# Allegro board Microcontroleur.brd
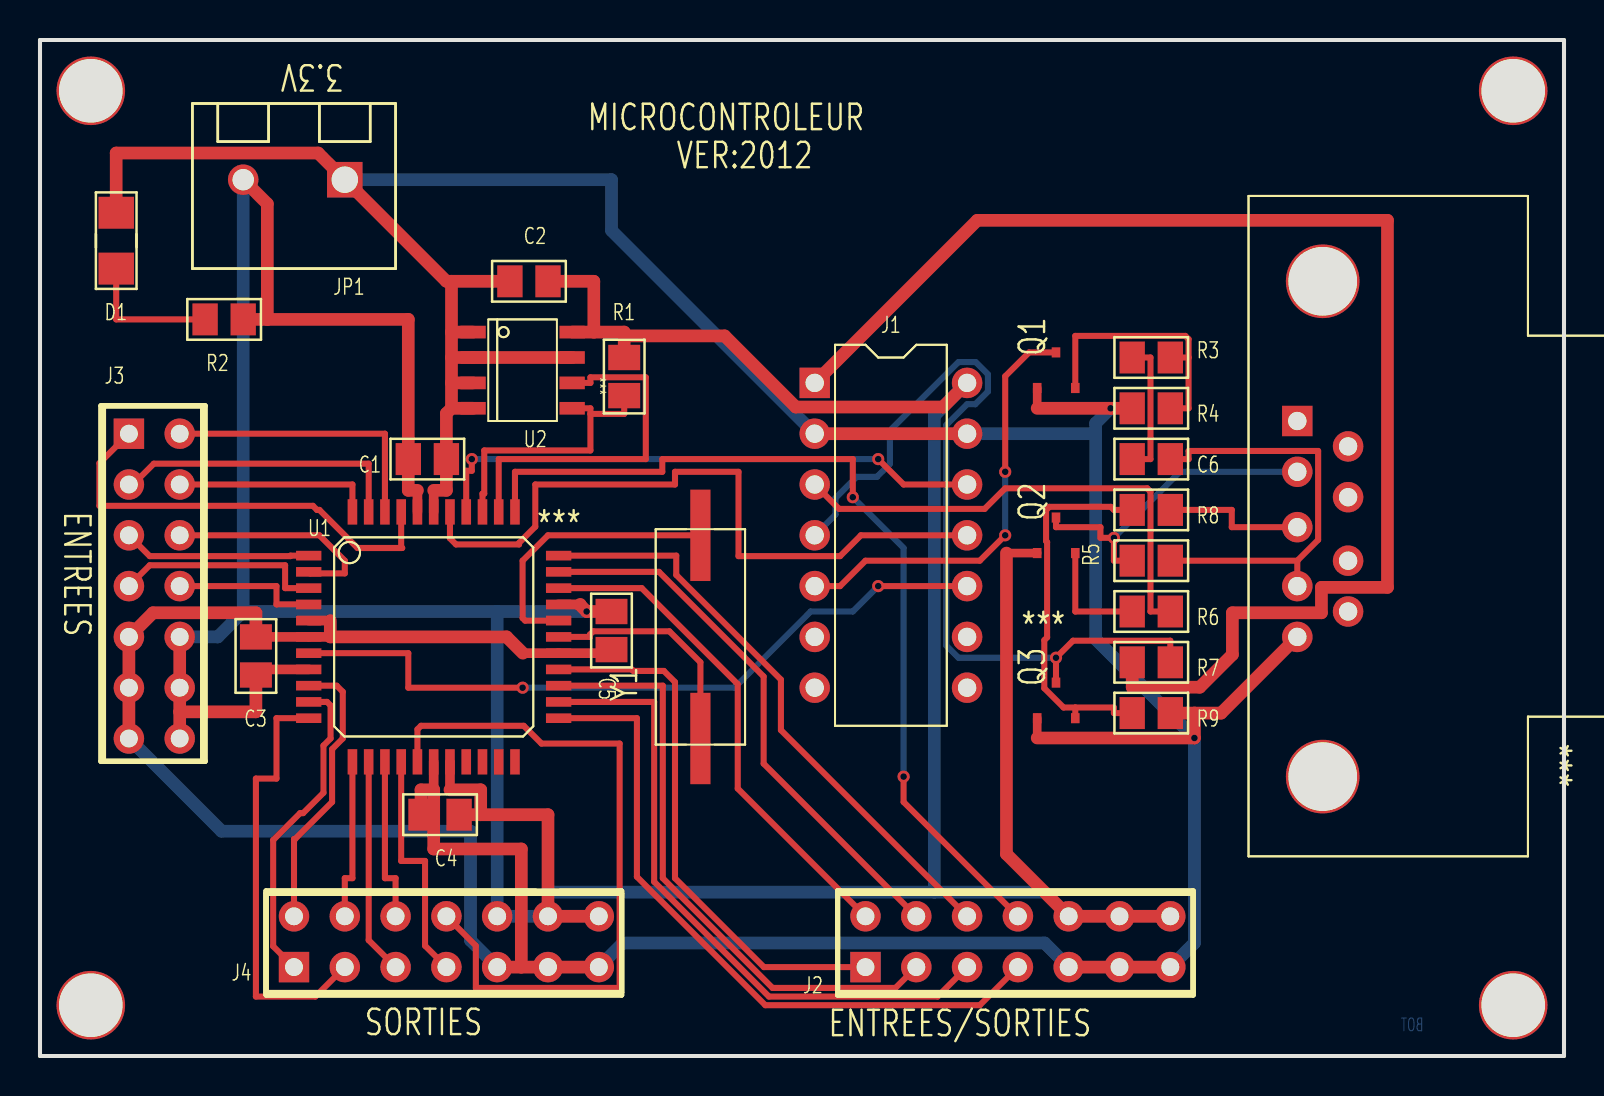
[diagram p0: board, top side]
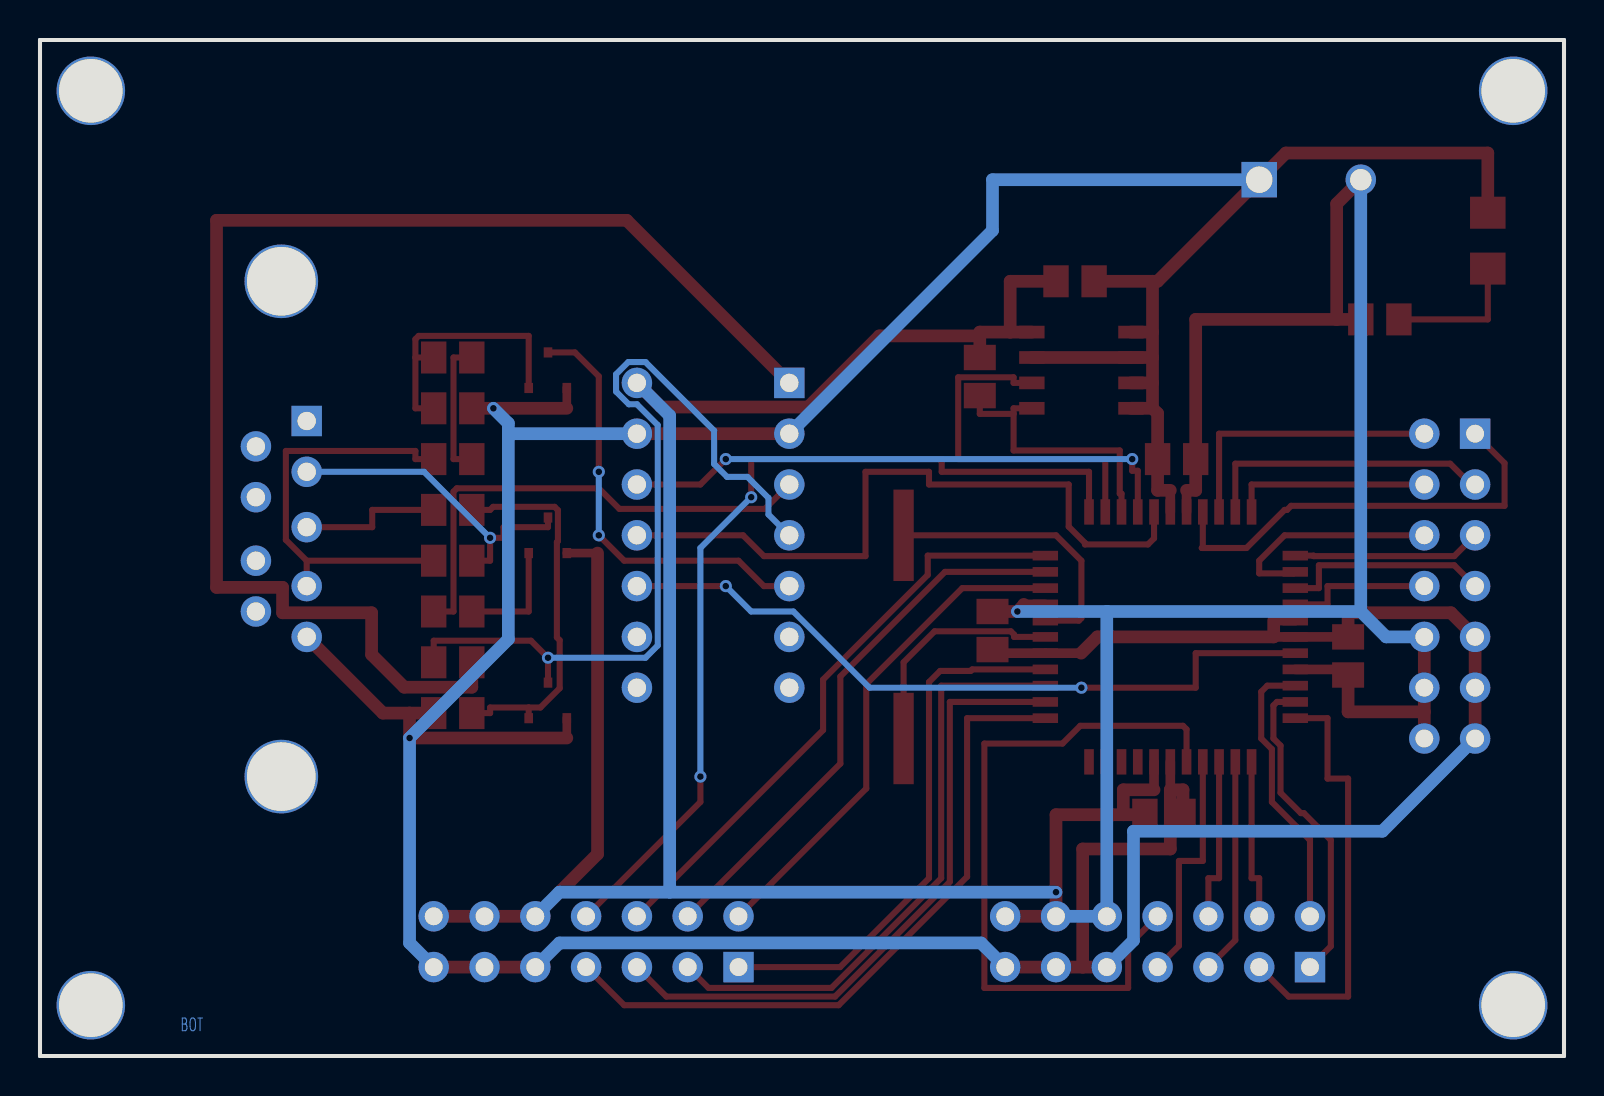
[diagram p1: board, bottom side, seen from below]

Outline 76.2 x 50.8 mm; copper layers: TOP, BOTTOM. Coordinates in mm from the lower left corner of the outline.

## Design rules (mm)
nets with their own width: min track width 0.178; nets 3.3V 3.3VEXT GND
nets with their own width: min track width 0.305; nets N00317 N01659 N01662 N02322 N02325 N25718 N27959 N27974 N50194 N50248 N50252 N50256 N50302 N50360 N50422 P0 P1 P2 P3 P4 P5 P6 P7 P8 P9 P10 P11 P12 P13 P14 P15 P20 P21 P22 P23 P24 P25 P26 P27 RESN RX TX

## Placement (name value [footprint] x y rotation side)
C1  0.1uF  [C_0805]  18.41 29.84 0 top
C2  0.1uF  [C_0805]  25.4 38.73 180 top
C3  0.1uF  [C_0805]  10.79 19.05 90 top
C4  0.1uF  [C_0805]  20.95 12.06 180 top
C5  0.1uF  [C_0805]  28.57 22.23 270 top
C6  0.01uF  [C_0805]  56.52 29.84 180 top
D1  Rouge  [D_1206]  3.81 39.37 90 top
J1  DIP-14  [DIP14_3]  38.73 33.66 0 top
J2  8-Entrees/Sorties  [HEADER_14]  41.27 4.45 0 top
J3  8-Entrees  [HEADER_14]  4.45 31.11 270 top
J4  8-Sorties  [HEADER_14]  12.7 4.45 0 top
JP1  3.3V  [CONNECTEUR_2_200]  15.24 43.81 180 top
NOREF  -  [unnamed]  0 0 0 top
P1  CONNECTOR DB9  [DB9_FEMELLE]  62.87 20.95 270 top
Q1  2N3904  [SOT23-312]  50.8 34.29 90 top
Q2  2N3906  [SOT23-312]  50.8 26.04 90 top
Q3  2N3904  [SOT23-312]  50.8 17.78 90 top
R1  10K  [R_0805]  29.21 33.02 90 top
R2  220  [R_0805]  10.16 36.83 180 top
R3  10K  [R_0805]  54.61 34.92 0 top
R4  10K  [R_0805]  56.52 32.38 180 top
R5  10K  [R_0805]  56.52 24.77 180 top
R6  1k  [R_0805]  54.61 22.23 0 top
R7  4.7k  [R_0805]  54.61 19.68 0 top
R8  10K  [R_0805]  56.52 27.3 180 top
R9  10K  [R_0805]  54.61 17.14 0 top
U1  P8X32A-Q44  [PQFP44]  19.68 20.95 0 top
U2  24LC256  [SOIC8]  24.13 34.29 0 top
Y1  10.0MHz  [CRYSTAL_SMD_180_40]  33.02 20.95 90 top

## Library data of the parts
C1-C5 = C
C6 = CAP
D1 = LED_0
J1 = DIPSOC-7x2: Tolerance: ***; User Part Number: ***
J2-J4 = HEADER 7X2
JP1 = HEADER 2_0
P1 = CONNECTOR DB9: User Part Number: ***
Q1 Q3 = 2N3904
Q2 = 2N3906
R1-R9 = R
U1 = P8X32A-d40_15: Tolerance: ***; User Part Number: ***
U2 = 24LC256_1: Tolerance: ***; User Part Number: ***
Y1 = CRYSTAL

## Footprints (pads in the part's own frame, mm; a bottom-side part is the same pattern mirrored in y, then rotated)
C_0805
  rect 1.27x1.6 smd: 1(0,0) 2(1.905,0)
CONNECTEUR_2_200
  rect 1.778x1.778 hole 1.321: 1(0,0)
  round 1.524 hole 1.067: 2(5.08,0)
CRYSTAL_SMD_180_40
  rect 4.572x1.016 smd: 1(-5.08,0) 2(5.08,0)
D_1206
  rect 1.6x1.778 smd: 1(0,0) 2(2.794,0)
DB9_FEMELLE
  round 3.683 hole 3.429 unplated: (-17.78,1.27) (6.985,1.27)
  rect 1.524x1.524 hole 0.914: 1(-10.795,0)
  round 1.524 hole 0.914: 2(-8.255,0) 3(-5.486,0) 4(-2.54,0) 5(0,0) 6(-9.525,2.54) 7(-6.985,2.54) 8(-3.81,2.54) 9(-1.27,2.54)
DIP14_3
  rect 1.524x1.524 hole 0.914: 1(0,0)
  round 1.524 hole 0.914: 2(0,-2.54) 3(0,-5.08) 4(0,-7.62) 5(0,-10.16) 6(0,-12.7) 7(0,-15.24) 8(7.62,-15.24) 9(7.62,-12.7) 10(7.62,-10.16) 11(7.62,-7.62) 12(7.62,-5.08) 13(7.62,-2.54) 14(7.62,0)
HEADER_14
  rect 1.524x1.524 hole 0.889: 1(0,0)
  round 1.524 hole 0.889: 2(0,2.54) 3(2.54,0) 4(2.54,2.54) 5(5.08,0) 6(5.08,2.54) 7(7.62,0) 8(7.62,2.54) 9(10.16,0) 10(10.16,2.54) 11(12.7,0) 12(12.7,2.54) 13(15.24,0) 14(15.24,2.54)
PQFP44
  rect 1.27x0.483 smd: 1(-6.248,4.064) 2(-6.248,3.251) 3(-6.248,2.438) 4(-6.248,1.626) 5(-6.248,0.813) 6(-6.248,0) 7(-6.248,-0.813) 8(-6.248,-1.626) 9(-6.248,-2.438) 10(-6.248,-3.251) 11(-6.248,-4.064) 23(6.248,-4.064) 24(6.248,-3.251) 25(6.248,-2.438) 26(6.248,-1.626) 27(6.248,-0.813) 28(6.248,0) 29(6.248,0.813) 30(6.248,1.626) 31(6.248,2.438) 32(6.248,3.251) 33(6.248,4.064)
  rect 0.483x1.27 smd: 12(-4.064,-6.248) 13(-3.251,-6.248) 14(-2.438,-6.248) 15(-1.626,-6.248) 16(-0.813,-6.248) 17(0,-6.248) 18(0.813,-6.248) 19(1.626,-6.248) 20(2.438,-6.248) 21(3.251,-6.248) 22(4.064,-6.248) 34(4.064,6.248) 35(3.251,6.248) 36(2.438,6.248) 37(1.626,6.248) 38(0.813,6.248) 39(0,6.248) 40(-0.813,6.248) 41(-1.626,6.248) 42(-2.438,6.248) 43(-3.251,6.248) 44(-4.064,6.248)
R_0805
  rect 1.27x1.6 smd: 1(0,0) 2(1.905,0)
SOIC8
  rect 1.27x0.635 smd: 1(-2.477,1.905) 2(-2.477,0.635) 3(-2.477,-0.635) 4(-2.477,-1.905) 5(2.477,-1.905) 6(2.477,-0.635) 7(2.477,0.635) 8(2.477,1.905)
SOT23-312
  rect 0.508x0.432 smd: 1(-0.889,0.94) 2(-0.889,-0.965) 3(0.889,0)
unnamed
  round 3.429 hole 3.175: (2.54,48.26) (2.54,2.54) (73.66,48.26) (73.66,2.54)

## Nets
3.3V: C1.1 C2.1 C3.1 C4.1 C5.1 J1.14 J2.10 J2.12 J2.14 J3.10 J3.12 J3.14 J4.10 J4.12 J4.14 JP1.2 Q2.1(EMITTER) R1.2 R2.1 U1.8 U1.18 U1.30 U1.40 U2.8(VCC)
3.3VEXT: J1.1 R7.1
GND: C1.2 C2.2 C3.2 C4.2 C5.2 D1.2 J1.2 J1.13 J2.9 J2.11 J2.13 J3.9 J3.11 J3.13 J4.9 J4.11 J4.13 JP1.1 P1.5 Q1.1(EMITTER) Q3.1(EMITTER) R4.2 R9.2 U1.5 U1.6(BOEN) U1.17 U1.27 U1.39 U2.1(A0) U2.2(A1) U2.3(A2) U2.4(VSS) U2.7(WP)
P0: J3.1 U1.41(P0)
P1: J3.2 U1.42(P1)
P2: J3.3 U1.43(P2)
P3: J3.4 U1.44(P3)
P4: J3.5 U1.1(P4)
P5: J3.6 U1.2(P5)
P6: J3.7 U1.3(P6)
P7: J3.8 U1.4(P7)
P8: J4.2 U1.9(P8)
P9: J4.1 U1.10(P9)
P10: J4.3 U1.11(P10)
P11: J4.4 U1.12(P11)
P12: J4.5 U1.13(P12)
P13: J4.6 U1.14(P13)
P14: J4.7 U1.15(P14)
P15: J4.8 U1.16(P15)
P20: J2.8 U1.34(P27)
P21: J2.6 U1.33(P26)
P22: J2.4 U1.32(P25)
P23: J2.2 U1.31(P24)
P24: J2.1 U1.26(P23)
P25: J2.3 U1.25(P22)
P26: J2.5 U1.24(P21)
P27: J2.7 U1.23(P20)
RESN: J1.5 Q1.3(COLLECTOR)
RX: J1.4 Q3.3(COLLECTOR) R7.2
TX: J1.3 R6.2
N00317: D1.1 R2.2
N01659: R1.1 U1.36(P29) U2.5(SDA)
N01662: U1.35(P28) U2.6(SCL)
N02322: U1.29(X0) Y1.2
N02325: U1.28(X1) Y1.1
N25718: J1.12 U1.37(P30)
N27959: J1.11 U1.38(P31)
N27974: J1.10 U1.7(RESN)
N50194: P1.2 Q2.3(COLLECTOR) R5.2
N50248: C6.1 P1.4 R5.1
N50252: C6.2 R3.1
N50256: Q1.2(BASE) R3.2 R4.1
N50302: Q3.2(BASE) R8.2 R9.1
N50360: P1.3 R8.1
N50422: Q2.2(BASE) R6.1

Pads without a net: J1 6 7 8 9; P1 1 6 7 8 9; U1 19 20 21 22

## Via types
v1: diameter 0.61, hole 0.33, TOP to BOTTOM, 14 vias

## Routing (per net, layer and track width the routed paths; a pad name or vN(x,y) marks a point on that pad's centre or on a via; arc(x,y) is an arc through that point)
3.3V: length 225.3
  TOP w0.432: 48.32,25.15 Q2.1
  TOP w0.483: 10.79,19.33 U1.8 ; 27.01,22.58 U1.30 ; 20.5,13.31 U1.18 ; U1.40 18.87,28.28
  TOP w0.635: 6.99,15.88 6.99,17.21 ; 6.99,17.21 6.99,20.95 ; 6.99,17.21 10.79,17.21 C3.1 10.79,19.33 ; 11.37,36.83 18.41,36.83 C1.1 18.41,28.28 18.87,28.28 ; 11.37,36.83 11.37,42.61 JP1.2 ; 11.37,36.83 R2.1 ; 20.5,13.31 22.03,13.31 22.03,12.06 ; 27.69,36.2 U2.8 ; 27.69,36.2 29.21,36.2 29.21,36 ; 27.69,36.2 27.69,38.73 C2.1 ; 27.01,22.58 27.01,22.54 v1(27.33,22.23) C5.1 ; 22.03,12.06 25.4,12.06 v1(25.4,8.19) J4.12 J4.14 ; 22.03,12.06 C4.1 ; 29.21,36 34.23,36 37.79,32.45 45.15,32.45 J1.14 ; 29.21,36 29.21,34.92 ; J2.14 J2.10 48.32,10.1 48.32,25.15
  BOTTOM w0.635: 10.16,22.23 8.89,20.95 6.99,20.95 ; 10.16,22.23 22.86,22.23 ; 10.16,22.23 JP1.2 ; 44.72,8.19 v1(25.4,8.19) ; 44.72,8.19 50.23,8.19 J2.10 ; 44.72,8.19 44.72,32.02 J1.14 ; 22.86,22.23 J4.10 J4.12 ; 22.86,22.23 v1(27.33,22.23)
3.3VEXT: length 68.4
  TOP w0.635: R7.1 54.61,18.44 57.99,18.44 59.62,20.07 59.62,22.16 64.07,22.16 64.07,23.43 67.37,23.43 67.37,41.78 46.86,41.78 J1.1
GND: length 256.6
  TOP w0.432: 49.86,15.9 Q3.1 ; 49.86,32.38 Q1.1
  TOP w0.483: U1.39 19.68,28.28 ; 24.14,20.14 U1.27 28.57,20.14 ; 14.52,20.95 U1.6 C3.2 ; 14.52,21.77 U1.5 ; U1.17 19.68,13.31
  TOP w0.635: J4.13 J4.11 24.07,4.45 ; U2.4 20.57,32.38 ; 20.57,32.38 20.32,32.13 C1.2 20.32,28.28 19.68,28.28 ; 20.57,32.38 20.57,33.66 ; 20.57,36.2 20.57,34.92 ; 20.57,36.2 U2.1 ; 20.57,36.2 20.57,38.73 ; 20.57,34.92 20.57,33.66 ; 20.57,34.92 U2.2 U2.7 ; 57.72,17.14 59.05,17.14 P1.5 ; 57.72,17.14 R9.2 ; 57.72,17.14 v1(57.72,15.9) 49.86,15.9 ; 24.14,20.14 23.33,20.95 14.52,20.95 14.52,21.77 ; 4.45,15.88 4.45,20.95 5.65,22.16 10.79,22.16 C3.2 ; R4.2 v1(53.53,32.38) 49.86,32.38 ; 20.57,38.73 20.32,38.73 JP1.1 13.91,45.15 3.81,45.15 D1.2 ; 20.57,38.73 23.5,38.73 ; 24.07,4.45 J4.9 ; 24.07,4.45 24.07,10.35 19.68,10.35 19.68,13.31 19.05,13.31 C4.2 ; J2.9 J2.13 ; U2.3 20.57,33.66 ; C5.2 28.57,20.14 ; J1.13 J1.2
  BOTTOM w0.635: 52.78,31.11 52.78,20.84 v1(57.72,15.9) 57.72,5.65 J2.13 ; 52.78,31.11 J1.13 ; 52.78,31.11 52.78,31.64 v1(53.53,32.38) ; 4.45,15.88 9.08,11.24 21.53,11.24 21.53,5.78 J4.9 ; J2.9 50.23,5.65 29.15,5.65 J4.13 ; J1.2 28.57,41.27 28.57,43.81 JP1.1
P0: length 22.1
  TOP w0.305: U1.41 18.06,25.45 18.11,25.4 15.88,25.4 13.97,27.3 13.85,27.3 13.65,27.51 2.97,27.51 2.97,29.64 J3.1
P1: length 14.2
  TOP w0.305: J3.2 17.25,31.11 U1.42
P2: length 14.8
  TOP w0.305: J3.3 4.65,28.57 5.69,29.62 16.43,29.62 U1.43
P3: length 10
  TOP w0.305: J3.4 15.62,28.57 U1.44
P4: length 9.4
  TOP w0.305: 4.45,26.04 5.49,24.99 12.52,24.99 12.52,25.02 U1.1
P5: length 11.3
  TOP w0.305: U1.2 13.51,24.13 15.24,24.13 15.24,24.77 13.97,26.04 6.99,26.04
P6: length 10.6
  TOP w0.305: 4.45,23.5 5.49,24.54 12.26,24.54 12.26,23.39 U1.3
P7: length 7.4
  TOP w0.305: U1.4 11.82,22.58 11.82,23.5 6.99,23.5
P8: length 14.1
  TOP w0.305: U1.9 14.83,18.52 15.14,18.21 15.14,15.88 14.61,15.34 14.61,12.7 12.75,10.85 12.7,10.85 J4.2
P9: length 16
  TOP w0.305: J4.1 11.66,5.49 11.66,10.79 13.01,12.14 13.16,12.14 14.17,13.16 14.17,15.52 14.53,15.88 14.53,17.53 14.35,17.7 U1.10
P10: length 21.6
  TOP w0.305: J4.3 13.77,2.97 10.79,2.97 10.79,13.87 11.82,13.87 11.82,16.89 U1.11
P11: length 8.1
  TOP w0.305: J4.4 15.24,8.89 15.62,8.89 U1.12
P12: length 10.8
  TOP w0.305: U1.13 16.43,5.79 J4.5
P13: length 8.3
  TOP w0.305: U1.14 17.25,8.89 17.78,8.89 J4.6
P14: length 11.9
  TOP w0.305: U1.15 18.06,9.75 19.25,9.75 19.25,5.51 J4.7
P15: length 35.8
  TOP w0.305: J4.8 21.79,5.51 21.79,3.4 28.98,3.4 28.98,15.62 25.08,15.62 24.19,16.51 19.05,16.51 18.87,16.33 U1.16
P20: length 45.8
  TOP w0.305: U1.34 23.75,29.21 31.11,29.21 31.11,29.84 40.64,29.84 v1(40.64,27.94) ; 48.9,6.99 43.18,12.7 v1(43.18,13.97)
  BOTTOM w0.305: v1(40.64,27.94) 43.18,25.4 v1(43.18,13.97)
P21: length 29.9
  TOP w0.305: J2.6 37.05,16.29 37.05,18.82 31.81,24.05 31.81,25.02 U1.33
P22: length 27.6
  TOP w0.305: U1.32 30.95,24.21 36.18,18.97 36.18,14.62 J2.4
P23: length 25.2
  TOP w0.305: J2.2 34.89,13.37 34.89,18.59 30.09,23.39 U1.31
P24: length 27.3
  TOP w0.305: J2.1 36.2,4.45 31.75,8.89 31.75,18.7 31.19,19.25 29.67,19.25 29.59,19.33 U1.26
P25: length 30.2
  TOP w0.305: J2.3 42.77,3.4 36.63,3.4 31.14,8.89 31.14,18.52 U1.25
P26: length 32.4
  TOP w0.305: J2.5 44.88,2.97 36.45,2.97 30.71,8.71 30.71,17.7 U1.24
P27: length 34.3
  TOP w0.305: U1.23 29.84,16.89 29.84,8.96 36.27,2.54 46.99,2.54 48.9,4.45
RESN: length 21.6
  TOP w0.305: v1(48.26,26.04) 46.99,24.77 41.27,24.77 40.01,23.5 J1.5 ; v1(48.26,29.21) 48.26,33.99 49.45,35.18 Q1.3
  BOTTOM w0.305: v1(48.26,26.04) v1(48.26,29.21)
RX: length 42.8
  TOP w0.305: Q3.3 v1(50.8,19.91) 51.65,20.76 56.52,20.76 R7.2
  BOTTOM w0.305: v1(50.8,19.91) 45.92,19.91 45.31,20.52 45.31,31.55 46.36,32.59 46.76,32.59 47.4,33.22 47.4,34.09 46.79,34.7 45.92,34.7 42.49,31.27 42.49,29.6 41.85,28.96 40.83,28.96 39.78,27.9 39.78,27.08 J1.4
TX: length 24.8
  TOP w0.305: J1.3 39.95,27.36 47.23,27.36 48.26,28.38 55.36,28.38 55.52,28.22 55.52,22.23 R6.2
N00317: length 7
  TOP w0.305: D1.1 3.81,36.83 R2.2
N01659: length 14.1
  TOP w0.305: R1.1 29.21,32.11 27.52,32.11 ; U1.36 22.12,28.12 22.21,28.12 22.21,30.28 27.52,30.28 27.52,32.11 ; 27.52,32.11 27.52,32.38 U2.5
N01662: length 18
  TOP w0.305: U1.35 22.94,29.85 30.29,29.85 30.29,33.93 27.52,33.93 27.52,33.66 U2.6
N02322: length 14.1
  TOP w0.305: 33.02,26.04 25.4,26.04 24.13,24.77 24.13,21.89 24.26,21.77 U1.29
N02325: length 11.7
  TOP w0.305: U1.28 27.5,20.95 27.5,21.07 27.66,21.23 31.47,21.23 33.02,19.68 33.02,15.88
N25718: length 28.2
  TOP w0.305: U1.37 21.31,29.26 21.59,29.26 v1(21.59,29.84) ; J1.12 43.18,28.57 v1(41.91,29.84)
  BOTTOM w0.305: v1(21.59,29.84) v1(41.91,29.84)
N27959: length 35.1
  TOP w0.305: J1.11 41.05,26.04 40.01,24.99 34.92,24.99 34.92,29.21 31.75,29.21 31.75,28.57 24.77,28.57 24.77,26.47 23.95,25.65 23.95,25.58 20.8,25.58 20.5,25.88 U1.38
N27974: length 36.7
  TOP w0.305: v1(24.13,18.41) 18.41,18.41 18.41,20.14 U1.7 ; J1.10 v1(41.91,23.5)
  BOTTOM w0.305: v1(24.13,18.41) 34.72,18.41 38.53,22.23 40.64,22.23 v1(41.91,23.5)
N50194: length 16.5
  TOP w0.305: Q2.3 50.8,26.44 53.02,26.44 53.02,25.91 v1(53.7,25.91) 53.7,24.77 R5.2
  BOTTOM w0.305: P1.2 57,29.21 v1(53.7,25.91)
N50248: length 21.3
  TOP w0.305: R5.1 62.87,24.77 ; 62.87,24.77 62.87,23.5 ; 62.87,24.77 63.91,25.81 63.91,30.25 57.43,30.25 57.43,29.84 C6.1
N50252: length 6.9
  TOP w0.305: C6.2 55.52,29.84 55.52,34.92 R3.1
N50256: length 13.6
  TOP w0.305: 57.43,34.92 57.43,32.38 R4.1 ; 57.43,34.92 57.43,35.84 57.27,36 51.77,36 Q1.2 ; 57.43,34.92 R3.2
N50302: length 19
  TOP w0.305: 51.77,17.42 53.7,17.42 53.7,17.14 R9.1 ; 51.77,17.42 51.18,17.42 50.22,18.39 50.22,20.79 50.36,20.93 50.36,25.69 50.3,25.74 50.3,27.29 50.47,27.46 53.54,27.46 53.7,27.3 R8.2 ; 51.77,17.42 Q3.2
N50360: length 7.2
  TOP w0.305: R8.1 59.59,27.3 59.59,26.44 P1.3
N50422: length 5.8
  TOP w0.305: Q2.2 51.77,22.23 R6.1

## Text on the board
BOTTOM: BOT
DEVICE_TYPE_TOP: FIGURE | SIZE | 13.0 | 35.0 | 36.0 | 42.0 | 52.0 | 125.0 | 135.0 | DRILL CHART: TOP to BOTTOM | ALL UNITS ARE IN MILS | PLATED | NON-PLATED | QTY | 10 | 42 | 23 | 1 | 4 | 2
